# Altium PCB KCInput_Attenuator_V0.2.PcbDoc
Units mil, origin at the board's own origin, x right, y up, seen from the top; angles counter-clockwise.
Board outline 4500 x 3600 mil, 2 copper layers (Top Layer, Bottom Layer); 60 components, 46 nets, 177 pads, 3 vias.
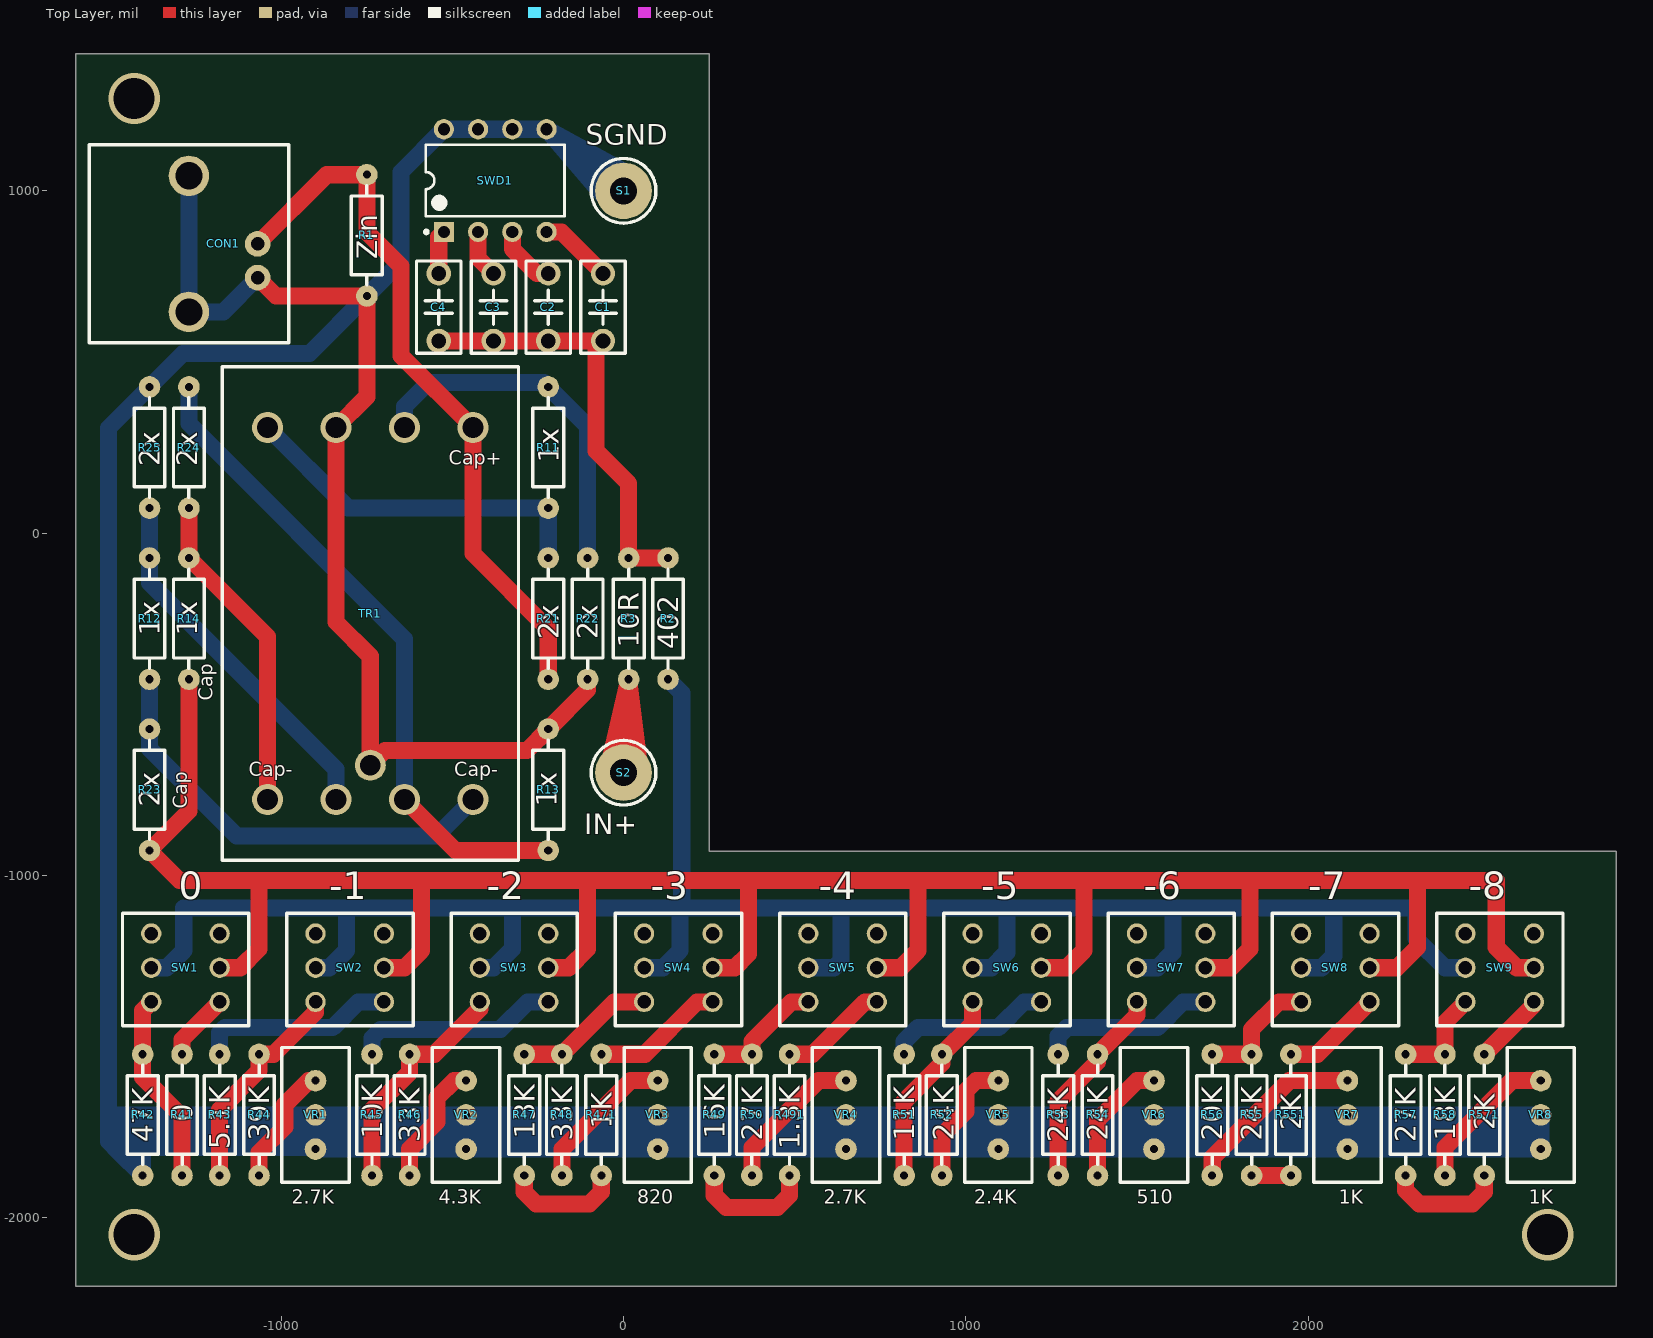
[diagram p0: Top Layer view]
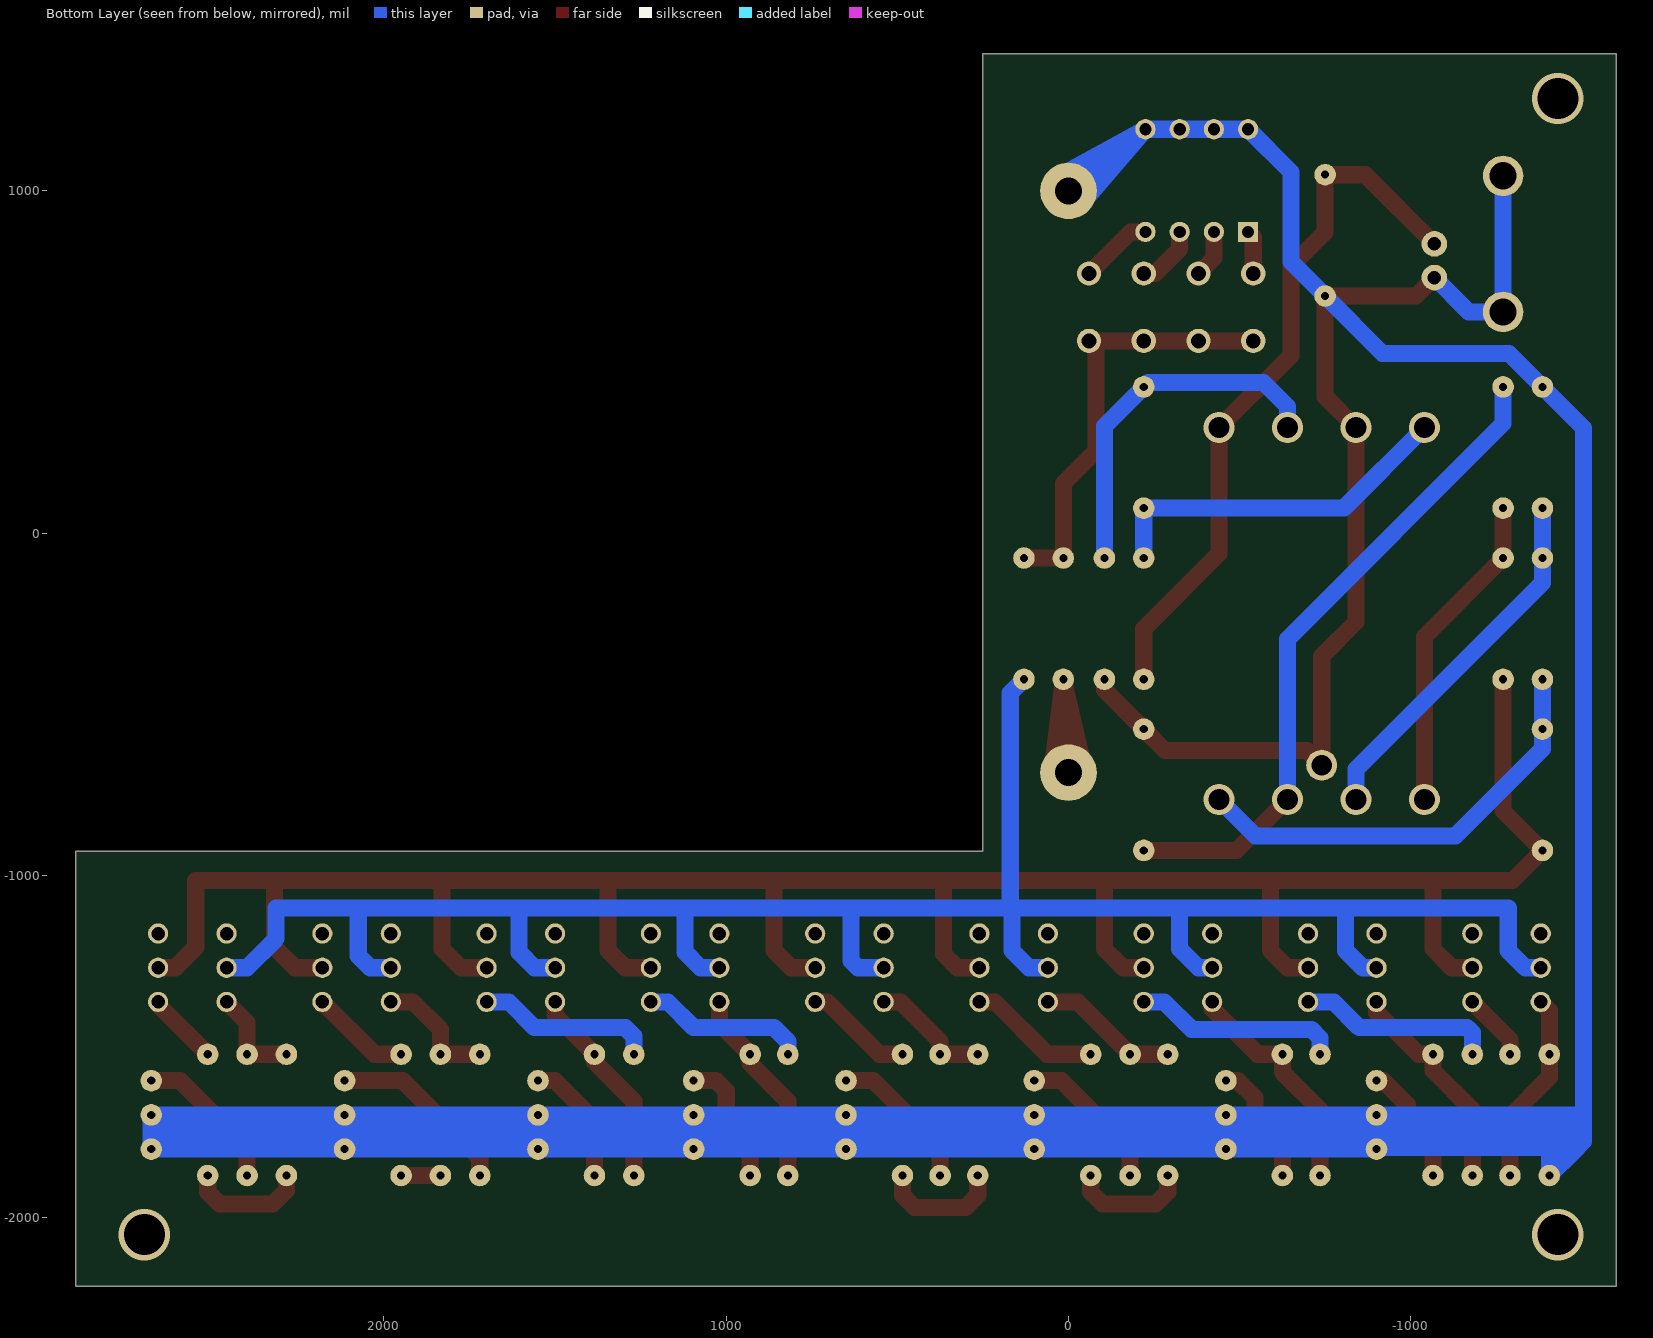
[diagram p1: Bottom Layer view, seen from below]
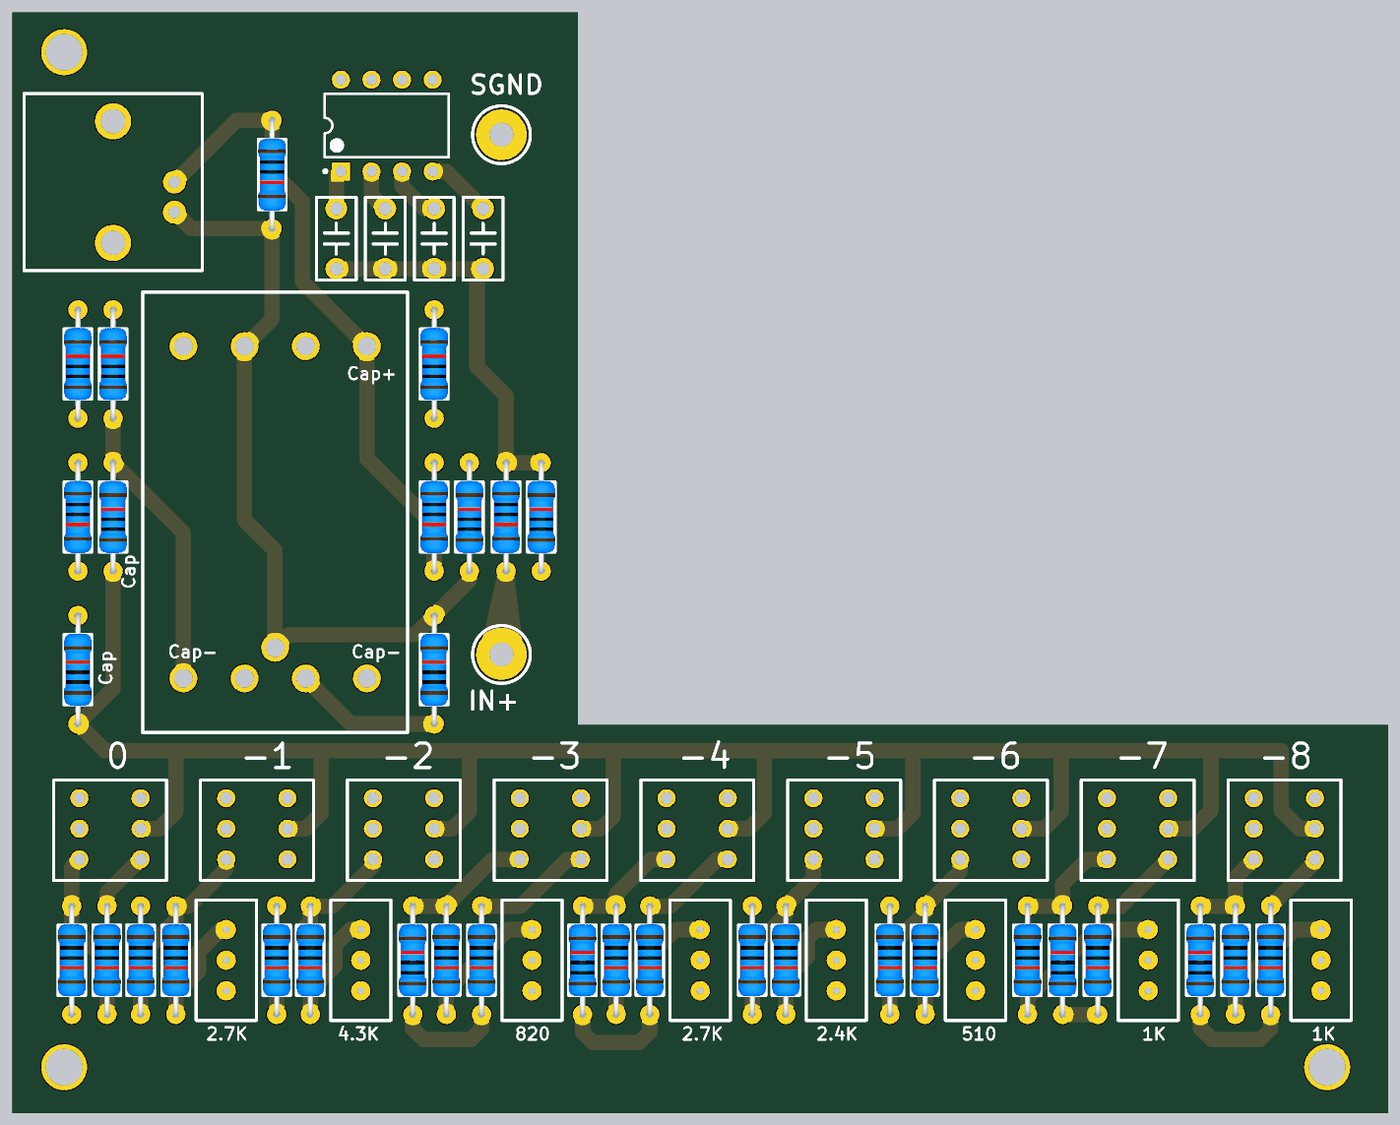
[diagram p2: 3D render of the assembled board from above, using the file's embedded part models]

## Layer stack, top to bottom
Top Solder: solder mask 0.4, Solder Resist, Dk 3.5
Top Layer: signal copper 1.4
Dielectric 1: dielectric 12.6, FR-4, Dk 4.8
Bottom Layer: signal copper 1.4
Bottom Solder: solder mask 0.4, Solder Resist, Dk 3.5

## Board outline
-1600,-2200 2900,-2200 2900,-930 250,-930 250,1400 -1600,1400

## Design rules (kind name [scope] priority, off if disabled: settings)
Clearance [All] p1: gap=10 ignorepadtopadclearanceinfootprint=FALSE except(0: Arc-Hole Track-Hole SMDPad-Hole THPad-Hole Via-Hole Fill-Hole Poly-Hole Region-Hole Text-Hole)
PolygonConnect [All] p1: connectstyle=Relief reliefconductorwidth=10 reliefentries=4 polygonreliefangle="90 Angle" airgapwidth=10
RoutingVias [All] p1: holewidth=28 width=50 viastyle="Through Hole" minholewidth=28 minwidth=50 maxholewidth=28 maxwidth=50
SolderMaskExpansion [All] p1: expansion=4
Width [All] p1: maxlimit=100 minlimit=10 preferedwidth=50
30 further rules are at their usual default settings.

## Components (designator, comment, footprint, x,y, rotation, side; value= is the part's Value field where it differs from the comment)
C1 "100pF" "CBB 6.3*6.3*5" -60,660 r270 top
C2 "100pF" "CBB 6.3*6.3*5" -220,660 r270 top
C3 "100pF" "CBB 6.3*6.3*5" -380,660 r270 top
C4 "20pF" "CBB 6.3*6.3*5" -540,660 r270 top
CON1 "RCA" RCA-RJ255 -1270,845 r0 top
R1 "Zin" "RS 1/4W" -750,870 r270 top
R2 "402" "RS 1/4W" 130,-250 r90 top
R3 "10R" "RS 1/4W" 15,-250 r270 top
R11 "1x" "RS 1/4W" -220,250 r90 top
R12 "1x" "RS 1/4W" -1385,-250 r270 top
R13 "1x" "RS 1/4W" -220,-750 r90 top
R14 "1x" "RS 1/4W" -1270,-250 r90 top
R21 "2x" "RS 1/4W" -220,-250 r270 top
R22 "2x" "RS 1/4W" -105,-250 r90 top
R23 "2x" "RS 1/4W" -1385,-750 r90 top
R24 "2x" "RS 1/4W" -1270,250 r90 top
R25 "2x" "RS 1/4W" -1385,250 r90 top
R41 "0" "RS 1/4W" -1290,-1700 r270 top
R42 "47K" "RS 1/4W" -1405,-1700 r270 top
R43 "5.1K" "RS 1/4W" -1180,-1700 r270 top
R44 "39K" "RS 1/4W" -1065,-1700 r270 top
R45 "10K" "RS 1/4W" -735,-1700 r270 top
R46 "33K" "RS 1/4W" -625,-1700 r270 top
R47 "13K" "RS 1/4W" -290,-1700 r90 top
R48 "33K" "RS 1/4W" -180,-1700 r270 top
R49 "16K" "RS 1/4W" 265,-1700 r90 top
R50 "27K" "RS 1/4W" 375,-1700 r270 top
R51 "11K" "RS 1/4W" 820,-1700 r270 top
R52 "24K" "RS 1/4W" 930,-1700 r270 top
R53 "24K" "RS 1/4W" 1270,-1700 r270 top
R54 "24K" "RS 1/4W" 1385,-1700 r270 top
R55 "24K" "RS 1/4W" 1835,-1700 r90 top
R56 "20K" "RS 1/4W" 1720,-1700 r270 top
R57 "27K" "RS 1/4W" 2285,-1700 r90 top
R58 "18K" "RS 1/4W" 2400,-1700 r270 top
R471 "1K" "RS 1/4W" -65,-1700 r270 top
R491 "1.3K" "RS 1/4W" 485,-1700 r270 top
R551 "2K" "RS 1/4W" 1950,-1700 r270 top
R571 "2K" "RS 1/4W" 2515,-1700 r270 top
S1 "SGND" Screw-M2-s 0,1000 r0 top
S2 "IN+" Screw-M2-s 0,-700 r0 top
SW1 "0" SWICH_3X2 -1280,-1270 r180 top
SW2 "-1" SWICH_3X2 -800,-1270 r180 top
SW3 "-2" SWICH_3X2 -320,-1270 r180 top
SW4 "-3" SWICH_3X2 160,-1270 r180 top
SW5 "-4" SWICH_3X2 640,-1270 r180 top
SW6 "-5" SWICH_3X2 1120,-1270 r180 top
SW7 "-6" SWICH_3X2 1600,-1270 r180 top
SW8 "-7" SWICH_3X2 2080,-1270 r180 top
SW9 "-8" SWICH_3X2 2560,-1270 r180 top
SWD1 "SW-DIP4" DIP-8 -375,1030 r90 top
TR1 "LL1527" LL1527 -740,-235 r270 top
VR1 "2.7K" "RS 1/2W-VR" -900,-1700 r90 top
VR2 "4.3K" "RS 1/2W-VR" -460,-1700 r90 top
VR3 "820" "RS 1/2W-VR" 100,-1700 r90 top
VR4 "2.7K" "RS 1/2W-VR" 650,-1700 r90 top
VR5 "2.4K" "RS 1/2W-VR" 1095,-1700 r90 top
VR6 "510" "RS 1/2W-VR" 1550,-1700 r90 top
VR7 "1K" "RS 1/2W-VR" 2115,-1700 r90 top
VR8 "1K" "RS 1/2W-VR" 2680,-1700 r90 top

## Footprints (in the part's own frame and the unit in brackets; to place one, negate y for a bottom-side part, rotate by r counter-clockwise, add the part's x,y. Pads: shape width x height; smd on the part's side, far side on the other; paste and mask are expansions set on the pad)
"CBB 6.3*6.3*5" [mm] "脚距5mm高6.3mm厚3mm"
  round 1.8 hole 1.1: 1(-2.5,0) 2(2.5,0)
  silkscreen extent -3.43,-1.65 3.43,1.65, body extent -3.15,-1.5 3.15,1.5, height 6.8
DIP-8 [mm] "DIP; 8 Leads; Row Spacing 7.62 mm; Pitch 2.54 mm"
  rect 1.5x1.5 hole 0.9: 1(-3.81,3.81)
  round 1.5 hole 0.9: 2(-3.81,1.27) 3(-3.81,-1.27) 4(-3.81,-3.81) 5(3.81,-3.81) 6(3.81,-1.27) 7(3.81,1.27) 8(3.81,3.81)
  silkscreen extent -3.93,-5.15 2.65,5.23, body extent -3.6,-5.15 3.6,5.15, height 5.08
LL1527 [mm] "Lundahl LL1527"
  round 2.3 hole 1.55: 1(-13.8,-7.62) 2(-13.8,-2.54) 3(-13.8,2.54) 4(-13.8,7.62) 5(13.8,-7.62) 6(13.8,-2.54) 7(13.8,2.54) 8(13.8,7.62) 9(11.26,0)
  silkscreen extent -18.3,-11 18.3,11
RCA-RJ255 [mm] "RCA Socket"
  round 1.9 hole 1: 1(5.1,0) 2(5.1,-2.5)
  round 3 hole 2.02: 2(0,-5.05) 2(0,5.05)
  silkscreen extent -7.4,-7.35 7.4,7.35
"RS 1/2W-VR" [mm] "直插3脚顶调可调电阻，脚距2.54mm，长10mm*宽5mm*高10mm"
  round 1.6 hole 0.6: 1(-2.54,0) 2(2.54,0) 3(0,0)
  silkscreen extent -5,-2.5 5,2.5
"RS 1/4W" [mm] "直插色环电阻，脚距9mm，直径2.3mm"
  round 1.6 hole 0.6: 1(-4.5,0) 2(4.5,0)
  silkscreen extent -3.68,-1.14 3.68,1.14, body extent -4.72,-1.16 4.73,1.16, height 2.32
Screw-M2-s [mm]
  round 4.2 hole 2: 1(0,0)
  silkscreen extent -2.4,-2.4 2.4,2.4
SWICH_3X2 [mm] "Double Pole Switch 6 Pin"
  round 1.5 hole 1: 1(2.54,2.54) 2(2.54,0) 3(2.54,-2.54) 4(-2.54,2.54) 5(-2.54,0) 6(-2.54,-2.54)
  silkscreen extent -4.7,-4.04 4.67,4.29

## Part data
C1 C2 C3 C4: library part C-CBB, "CBB电容", BOM名称=CBB电容, 学习资源=www.ooocke.com, 版权归属=源创客
CON1: "RCA Connector", Publisher="Altium Limited", Revision="17-Jul-2002: Re-released for DXP Platform."
R1 R2 R3 R11 R12 R13 R14 R21 R22 R23 R24 R25 R41 R42 R43 R44 R45 R46 R47 R48 R49 R50 R51 R52 R53 R54 R55 R56 R57 R58 R471 R491 R551 R571: library part R-CRR, "直插色环电阻", BOM名称=色环电阻, 学习资源=www.ooocke.com, 版权归属=源创客
S1 S2: library part ScrewConnector, "Screw Connector"
SW1 SW2 SW3 SW4 SW5 SW6 SW7 SW8 SW9: library part Switch_3x2, "Switch 3 pin 2 level"
SWD1: "DIP Switch", LatestRevisionDate=17-Jul-2002, LatestRevisionNote="Re-released for DXP Platform.", PackageReference=DIP-8, Published=24-Mar-1999, Publisher="Altium Limited"
TR1: "Lundahl LL1527"
VR1 VR2 VR3 VR4 VR5 VR6 VR7 VR8: library part VR-W, "直插可调电阻-顶调"

## Via types
v1: diameter 150, hole 120, Top Layer to Bottom Layer, 3 vias

## Nets (pads, with @x,y where several pads share a name; then routed paths per layer and width w, separated by ;. In a path a pad name is that pad's centre, name@x,y a point inside that pad or via, vN(x,y) a via of type N, cw(c..) or ccw(c..) an arc to the next point about the centre after c; other vN are vias at no path point)
NetC1_1: C1.1 SWD1.4 | length 215.4
  Top Layer w50: SWD1.4 -181.57,880 C1.1
NetC1_2: C1.2 C2.2 C3.2 C4.2 R2.2 R3.1 | length 1277
  Top Layer w50: C4.2 C2.2 C1.2 ; C1.2 -80,541.57 -80,240 15,145 R3.1 R2.2
NetC2_1: C2.1 SWD1.3 | length 184.6
  Top Layer w50: SWD1.3 -325,830 -253.43,758.43 C2.1
NetC3_1: C3.1 SWD1.2 | length 140.2
  Top Layer w50: SWD1.2 -425,803.43 C3.1
NetC4_1: C4.1 SWD1.1 | length 127.8
  Top Layer w50: C4.1 -540,865 SWD1.1
NetCON1_1: CON1.1 R1.1 R21.2 TR1.4 | length 2096.8
  Top Layer w50: CON1.1 -867.05,1047.17 R1.1 -750,880 -650,780 -650,518.31 TR1.4 -440,-60 -220,-280 R21.2
NetCON1_2: CON1.2 R1.2 R13.2 R22.1 R25.2 R42.2 S1.1 SWD1.5 SWD1.6 SWD1.7 SWD1.8 TR1.2 TR1.9 VR1.1 VR1.3 VR2.1 VR2.3 VR3.1 VR3.3 VR4.1 VR4.3 VR5.1 VR5.3 VR6.1 VR6.3 VR7.1 VR7.3 VR8.1 VR8.3 | length 24905.4
  Top Layer w50: CON1.2@-1069.21,746.57 -1015.47,692.83 R1.2 -750,398.31 TR1.2 -840,-260 -740,-360 TR1.9 -696.69,-635 -282.17,-635 R13.2 -105,-457.83 R22.1 ; S1.1@45,970 S1.1@45.16,970.24
  Bottom Layer w50: -1475,-1765 2645,-1765 VR8.1 ; -1425,-1800 -1431.08,-1806.08 -1476.08,-1806.08 ; CON1.2@-1270,1043.82 -1270,646.18 -1169.61,646.18 CON1.2@-1069.21,746.57 ; S1.1@-40,965 -40.29,965.33 SWD1.5 ; S1.1 SWD1.5 ; S1.1@5,1055 SWD1.5 ; -1505,-1740 -1505,-1700 ; -1505,-1740 -1505,-1777.17 -1476.08,-1806.08 ; -1505,-1740 2680,-1740 ; -1505,-1700 -1505,307.17 R25.2 -1287.17,525 -917.83,525 R1.2 -650,792.83 -650,1055 SWD1.8 SWD1.5 ; -1505,-1700 VR1.3 VR2.3 VR3.3 VR4.3 VR5.3 VR6.3 VR8.3 2680,-1740 ; -1476.08,-1806.08 R42.2 -1405,-1795 -905,-1795 VR1.1 VR7.1 VR8.1 ; VR8.1 2680,-1740
NetR2_1: R2.1 SW1.2 SW2.2 SW3.2 SW4.2 SW5.2 SW6.2 SW7.2 SW8.2 SW9.2 | length 6524.6
  Bottom Layer w50: SW1.2 -1335,-1270 -1285,-1220 -1285,-1095 -810,-1095 ; SW2.2 -860,-1270 -810,-1220 -810,-1095 ; SW3.2 -380,-1270 -325,-1215 -325,-1095 ; SW4.2 115,-1270 165,-1220 165,-1095 -325,-1095 ; R2.1 170,-467.17 170,-1095 635,-1095 ; SW5.2 615,-1270 635,-1250 635,-1095 ; SW6.2 1075,-1270 1120,-1225 1120,-1095 ; SW7.2 1560,-1270 1605,-1225 1605,-1095 ; SW8.2 2040,-1270 2075,-1235 2075,-1095 ; SW9.2 2400,-1270 2315,-1185 2315,-1095 2075,-1095 ; -810,-1095 -325,-1095 ; 635,-1095 1120,-1095 ; 1120,-1095 1605,-1095 ; 1605,-1095 2075,-1095
NetR3_2: R3.2 S2.1 | length 827.9
  Top Layer w50: S2.1@-45,-685 R3.2 ; S2.1 R3.2 ; S2.1@50,-715 47.47,-694.23 R3.2
NetR11_1: R11.1 R21.1 TR1.1 | length 1063.2
  Bottom Layer w50: TR1.1 -804.53,72.83 R11.1 R21.1
NetR11_2: R11.2 R22.2 TR1.3 | length 1063.6
  Bottom Layer w50: TR1.3 -640,370 -570,440 -232.83,440 R11.2 -105,312.17 R22.2
NetR12_1: R12.1 R25.1 TR1.6 | length 1076.9
  Bottom Layer w50: R25.1 R12.1 -1385,-145 -840,-690 TR1.6
NetR12_2: R12.2 R23.2 TR1.8 | length 1297.7
  Bottom Layer w50: R12.2 R23.2 -1385,-630 -1130,-885 -546.69,-885 TR1.8
NetR13_1: R13.1 R24.2 TR1.7 | length 1948.1
  Top Layer w50: TR1.7 -491.14,-927.17 R13.1
  Bottom Layer w50: R24.2 -1270,320 -640,-310 TR1.7
NetR14_1: R14.1 R23.1 SW1.5 SW2.5 SW3.5 SW4.5 SW5.5 SW6.5 SW7.5 SW8.5 SW9.5 | length 7605.8
  Top Layer w50: R14.1 -1270,-812.17 R23.1 -1297.17,-1015 -1065,-1015 ; SW1.5 -1120,-1270 -1065,-1215 -1065,-1015 ; SW2.5 -640,-1270 -590,-1220 -590,-1015 ; SW3.5 -160,-1270 -105,-1215 -105,-1015 ; SW4.5 325,-1270 365,-1230 365,-1015 ; SW5.5 810,-1270 860,-1220 860,-1015 ; SW6.5 1295,-1270 1345,-1220 1345,-1015 ; SW7.5 1775,-1270 1830,-1215 1830,-1015 ; SW8.5 2260,-1270 2320,-1210 2320,-1015 ; SW9.5 2610,-1270 2550,-1210 2550,-1015 2320,-1015 ; -1065,-1015 -590,-1015 ; -590,-1015 -105,-1015 ; -105,-1015 365,-1015 ; 365,-1015 860,-1015 ; 860,-1015 1345,-1015 ; 1345,-1015 1830,-1015 ; 1830,-1015 2320,-1015
NetR14_2: R14.2 R24.1 TR1.5 | length 946.4
  Top Layer w50: R24.1 R14.2 -1040,-302.83 TR1.5
NetR41_1: R41.1 SW1.4 | length 198.4
  Top Layer w50: R41.1 -1290,-1480 SW1.4
NetR41_2: R41.2 R42.1 SW1.1 | length 565.2
  Top Layer w50: SW1.1 -1405,-1395 R42.1 -1405,-1590 -1290,-1705 R41.2
NetR43_1: R43.1 SW2.4 | length 580.1
  Bottom Layer w50: R43.1 -1180,-1460 -1165,-1445 -850,-1445 -775,-1370 SW2.4
NetR43_2: R43.2 R44.1 SW2.1 | length 647.8
  Top Layer w50: R43.2 -1180,-1685 -1065,-1570 R44.1 -1022.83,-1522.83 -900,-1400 SW2.1
NetR44_2: R44.2 VR1.2 | length 357.2
  Top Layer w50: R44.2 -1065,-1810 -990,-1735 -990,-1670 -920,-1600 VR1.2
NetR45_1: R45.1 SW3.4 | length 606.3
  Bottom Layer w50: R45.1 -735,-1475 -710,-1450 -360,-1450 -280,-1370 SW3.4
NetR45_2: R45.2 R46.1 SW3.1 | length 679.9
  Top Layer w50: R45.2 -735,-1685 -625,-1575 R46.1 -552.83,-1522.83 -420,-1390 SW3.1
NetR46_2: R46.2 VR2.2 | length 366
  Top Layer w50: R46.2 -625,-1800 -545,-1720 -545,-1650 -495,-1600 VR2.2
NetR47_1: R47.1 R471.2 | length 349.7
  Top Layer w50: R47.1 -290,-1925 -255,-1960 -100,-1960 -65,-1925 R471.2
NetR47_2: R47.2 R48.1 SW4.1 | length 413.3
  Top Layer w50: R47.2 R48.1 -27.17,-1370 SW4.1
NetR48_2: R48.2 VR3.2 | length 440
  Top Layer w50: R48.2 -180,-1800 20,-1600 VR3.2
NetR49_1: R49.1 R491.2 | length 364.7
  Top Layer w50: R49.1 265,-1935 300,-1970 450,-1970 485,-1935 R491.2
NetR49_2: R49.2 R50.1 SW5.1 | length 360.5
  Top Layer w50: R49.2 R50.1 375,-1485 490,-1370 SW5.1
NetR50_2: R50.2 VR4.2 | length 437.9
  Top Layer w50: R50.2 375,-1795 570,-1600 VR4.2
NetR51_1: R51.1 SW6.4 | length 485.5
  Bottom Layer w50: R51.1 820,-1485 860,-1445 1095,-1445 1170,-1370 SW6.4
NetR51_2: R51.2 R52.1 SW6.1 | length 590
  Top Layer w50: R51.2 820,-1660 930,-1550 R52.1 1020,-1432.83 SW6.1
NetR52_2: R52.2 VR5.2 | length 383.6
  Top Layer w50: R52.2 930,-1760 1000,-1690 1000,-1630 1030,-1600 VR5.2
NetR53_1: R53.1 SW7.4 | length 524.3
  Bottom Layer w50: R53.1 1270,-1470 1295,-1445 1560,-1445 1635,-1370 SW7.4
NetR53_2: R53.2 R54.1 SW7.1 | length 602.4
  Top Layer w50: R53.2 1270,-1660 1385,-1545 R54.1 1500,-1407.83 SW7.1
NetR54_2: R54.2 VR6.2 | length 374.8
  Top Layer w50: R54.2 1385,-1715 1500,-1600 VR6.2
NetR55_1: R55.1 R551.2 | length 115
  Top Layer w50: R55.1 R551.2
NetR55_2: R55.2 R56.1 SW8.1 | length 366
  Top Layer w50: R56.1 R55.2 1835,-1450 1915,-1370 SW8.1
NetR56_2: R56.2 VR7.2 | length 540.4
  Top Layer w50: R56.2 1720,-1825 1945,-1600 VR7.2
NetR57_1: R57.1 R571.2 | length 351.7
  Top Layer w50: R57.1 2285,-1920 2325,-1960 2480,-1960 2515,-1925 R571.2
NetR57_2: R57.2 R58.1 SW9.1 | length 292.7
  Top Layer w50: R57.2 R58.1 2400,-1430 SW9.1
NetR58_2: R58.2 VR8.2 | length 442.9
  Top Layer w50: R58.2 2400,-1795 2595,-1600 VR8.2
NetR471_1: R471.1 SW4.4 | length 388.3
  Top Layer w50: R471.1 62.17,-1522.83 215,-1370 SW4.4
NetR491_1: R491.1 SW5.4 | length 318.3
  Top Layer w50: R491.1 552.17,-1522.83 705,-1370 SW5.4
NetR551_1: R551.1 SW8.4 | length 293.3
  Top Layer w50: R551.1 2027.17,-1522.83 SW8.4
NetR571_1: R571.1 SW9.4 | length 212.9
  Top Layer w50: R571.1 2660,-1377.83 SW9.4
pads on no net: SW1.3 SW1.6 SW2.3 SW2.6 SW3.3 SW3.6 SW4.3 SW4.6 SW5.3 SW5.6 SW6.3 SW6.6 SW7.3 SW7.6 SW8.3 SW8.6 SW9.3 SW9.6
copper on no net:
  other v1: -1430,-2050 2700,-2050 -1430,1270

## Silkscreen, mask and mechanical layers (free items; w line width, h text height)
Top Overlay:
  text "Cap+" at -510,200 h40
  text "Cap" at -1200,-490 h40 r90
  text "Cap-" at -1095,-710 h40
  text "Cap-" at -495,-710 h40
  text "Cap" at -1275,-805 h40 r90
Drill Drawing:
  the board outline again, w10